# Altium PCB pcb.PCBDOC (part 3 of 4)
Units mil, origin at the board's own origin, x right, y up, seen from the top; angles counter-clockwise.
Board outline 6250 x 3000 mil, 6 copper layers (Top Layer, Internal Plane 1, Mid-Layer 1, Mid-Layer 2, Internal Plane 2, Bottom Layer); 189 components, 357 nets, 1696 pads, 997 vias.
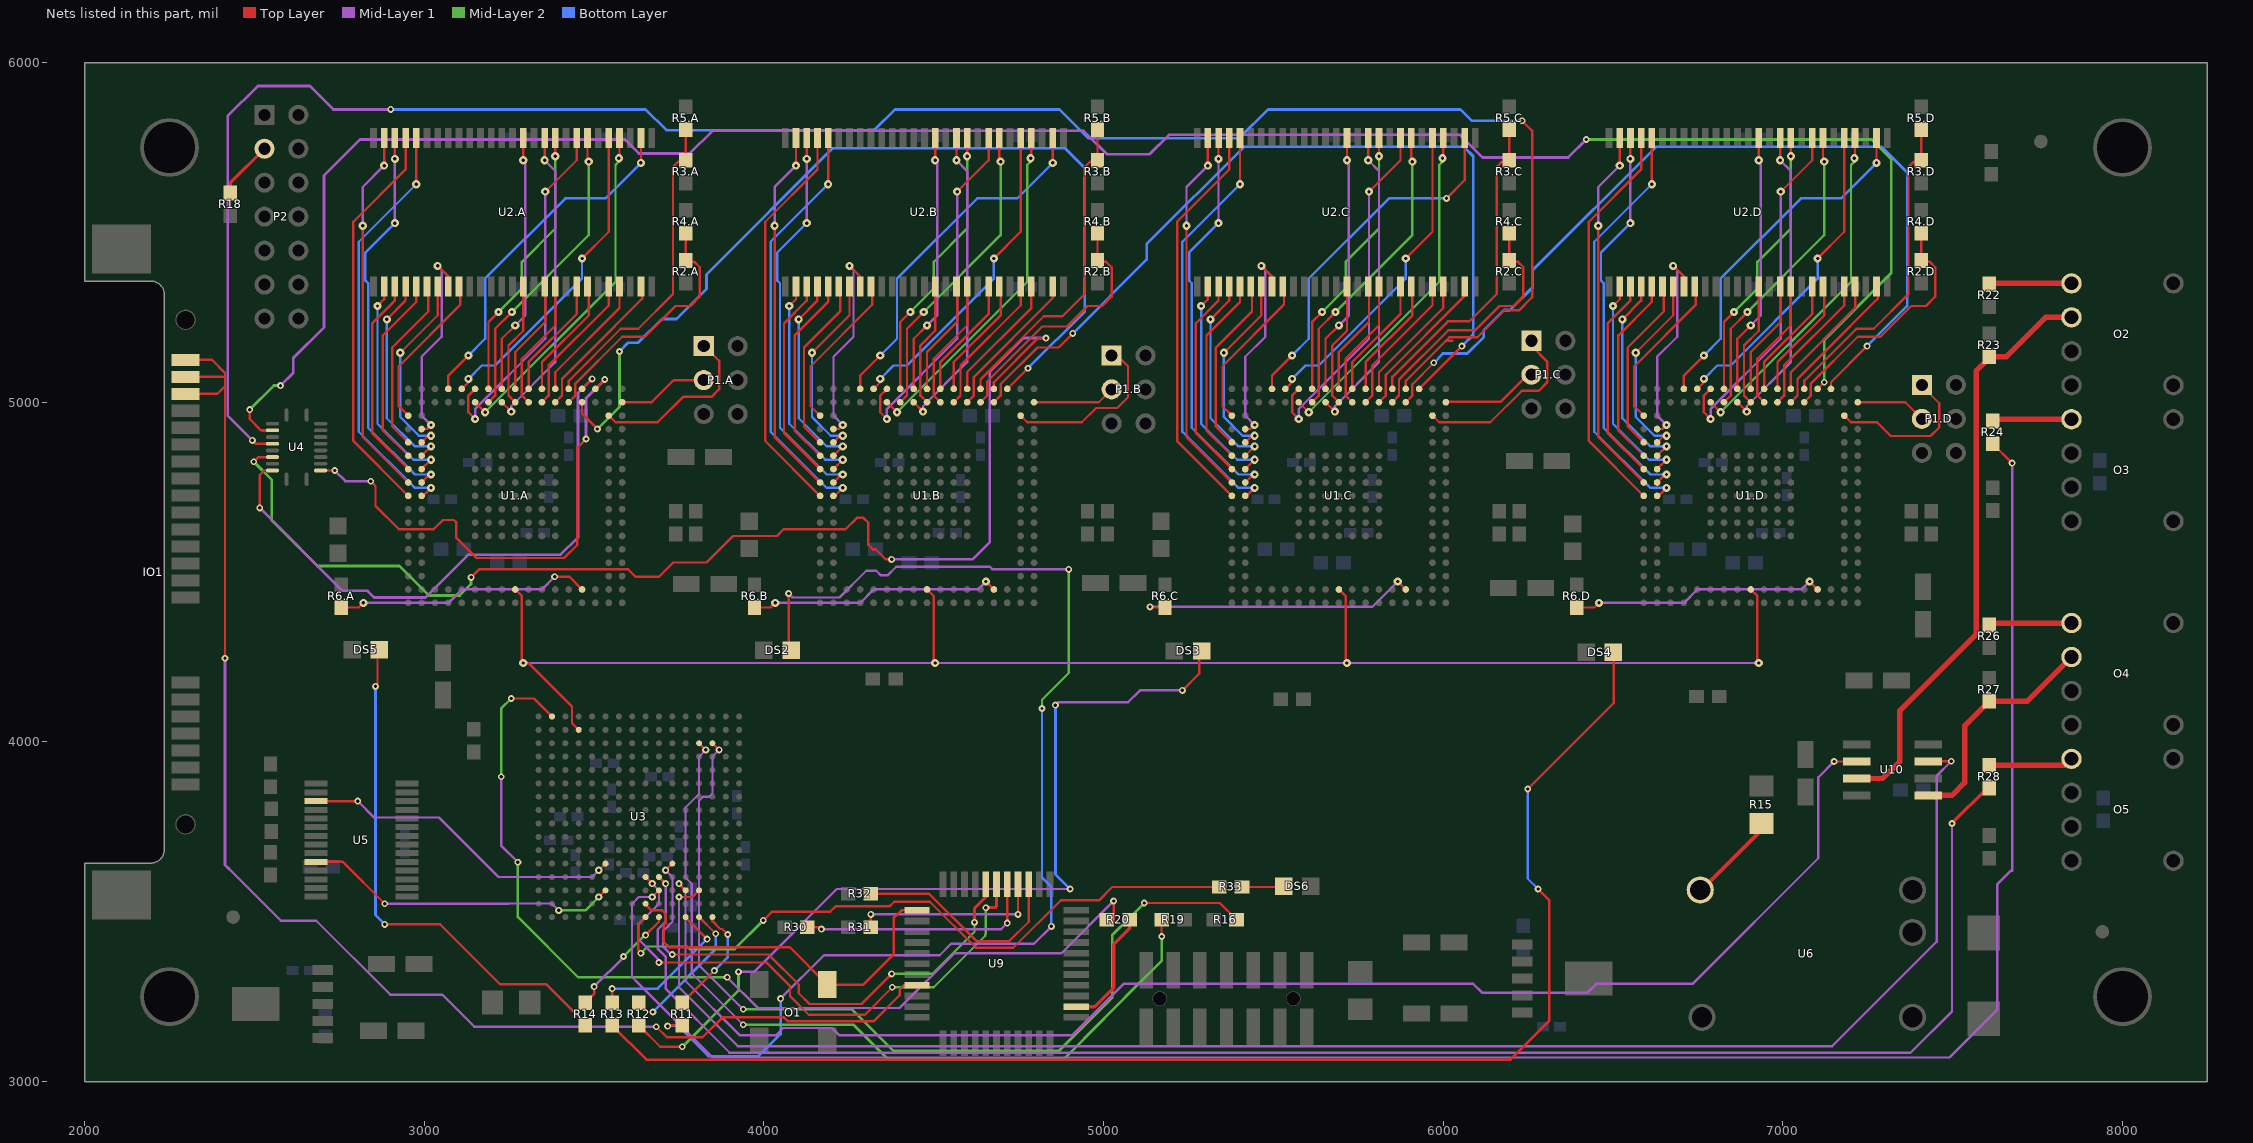
[diagram p7: the nets of this part, all layers, seen from the top]

## Via types
v1: diameter 24, hole 10, Top Layer to Bottom Layer, tented top, 281 vias
v2: diameter 24, hole 10, Top Layer to Bottom Layer, 250 vias
v3: diameter 20, hole 10, Top Layer to Bottom Layer, 211 vias
v4: diameter 21.2, hole 10, Top Layer to Bottom Layer, tented top, 109 vias
v5: diameter 20, hole 10, Top Layer to Bottom Layer, tented top, 96 vias
v6: diameter 40, hole 20, Top Layer to Bottom Layer, 25 vias
v7: diameter 25, hole 15, Top Layer to Bottom Layer, 9 vias
v8: diameter 35, hole 20, Top Layer to Bottom Layer, 8 vias
v9: diameter 40, hole 25, Top Layer to Bottom Layer, 8 vias

## Nets (pads, with @x,y where several pads share a name; then routed paths per layer and width w, separated by ;. In a path a pad name is that pad's centre, name@x,y a point inside that pad or via, vN(x,y) a via of type N, cw(c..) or ccw(c..) an arc to the next point about the centre after c; other vN are vias at no path point) (continued)
NetDS2_1: DS2.1 R11.2 | length 3579.5
  Top Layer w7: v3@3718.5,3165.35 R11.2@3759.84,3165.35 ; DS2.1@4072.83,4261.81 v3(4072.83,4437.01)
  Mid-Layer 1 w7: v3(4049.21,3244.09) 4177.17,3372.05 4517.72,3372.05 4551.18,3405.51 4795.28,3405.51 v3(4846.46,3456.69) ; v3(4072.83,4437.01) 4084.65,4425.2 4222.44,4425.2 4301.18,4503.94 4330.71,4503.94 4344.49,4490.16 4364.17,4490.16 4389.76,4515.75 4665.35,4515.75 4673.23,4507.87 v3(4897.64,4507.87)
  Mid-Layer 2 w7: v3(4818.9,4098.43) 4818.9,4124.02 4897.64,4202.76 v3(4897.64,4507.87)
  Bottom Layer w7: v3(3716.54,3163.39) 3748.03,3163.39 3836.61,3074.8 3984.25,3074.8 4049.21,3139.76 v3(4049.21,3244.09) ; v3(4818.9,4098.43) 4818.9,3600.39 4846.46,3572.83 v3(4846.46,3456.69)
NetDS3_1: DS3.1 R12.2 | length 2604.3
  Top Layer w7: R12.2@3631.89,3165.35 3694.88,3102.36 v3(3759.84,3102.36) ; v3(5232.28,4151.57) 5281.5,4200.79 DS3.1@5281.5,4263.78
  Mid-Layer 1 w7: v3(3925.2,3322.83) 3970.47,3322.83 4214.57,3566.93 v3(4901.57,3566.93) ; v3(4858.27,4108.27) 4867.13,4117.13 5072.83,4117.13 5107.28,4151.57 v3(5232.28,4151.57)
  Mid-Layer 2 w8: v3(3759.84,3102.36) 3925.2,3267.72 v3(3925.2,3322.83)
  Bottom Layer w8: v3(4858.27,4108.27) 4858.27,3610.24 v3(4901.57,3566.93)
NetDS4_1: DS4.1 R13.2 | length 4062.2
  Top Layer w7: R13.2@3553.15,3165.35 3654,3064.5 6198.36,3064.5 6312.01,3178.15 6312.01,3534.45 v3(6279.53,3566.93) ; v3(6249.02,3861.22) 6501.97,4114.17 DS4.1@6501.97,4261.81
  Bottom Layer w6: v3(6249.02,3861.22) 6249.02,3597.44 v3(6279.53,3566.93)
NetDS5_1: DS5.1 R14.2 | length 1518.4
  Top Layer w7: v3(2856.3,4163.39) 2862.2,4169.29 DS5.1@2862.2,4255.91 ; v3(2883.86,3462.6) 3047.24,3462.6 3223.63,3286.21 3359.46,3286.21 R14.2@3474.41,3171.26
  Bottom Layer w8: v3(2856.3,4163.39) 2856.3,3490.16 v3(2883.86,3462.6)
NetDS6_1: DS6.1 R33.2 | length 135.8
  Top Layer w7: R33.2@5407.48,3572.83 DS6.1@5543.31,3572.83
NetIO1_P13: IO1.P13 IO1.P14 IO1.P15 U9.8 | length 4147.6
  Top Layer w7: IO1.P13@2297.24,5025 2391.14,5025 2413.39,5047.24 ; IO1.P14@2297.24,5075 2407.28,5075 ; IO1.P15@2297.24,5125 2375,5125 2413.39,5086.61 v3(2413.39,4246.06) ; v3(3683.07,3161.42) 3714.28,3130.21 3819.18,3130.21 3877.95,3188.98 4059.06,3188.98 4070.87,3177.17 4322.83,3177.17 4399.61,3253.94 4399.61,3271.65 4411.42,3283.46 U9.8@4450.79,3283.46
  Mid-Layer 1 w7: 2426.18,3625 2577.76,3473.43 2682.09,3473.43 2899.61,3255.91 3053.15,3255.91 3147.64,3161.42 v3(3683.07,3161.42)
  Mid-Layer 1 w8: v3(2413.39,4246.06) 2413.39,3637.8 2426.18,3625
NetO1_3: O1.3 U3.R9 U9.1 | length 1108.5
  Top Layer w7: U3.R9@3650.59,3522.64 U3.R9@3651.58,3523.62 ; U3.R9@3651.57,3521.65 3669.29,3503.94 3700.79,3503.94 3710.63,3494.09 3710.63,3466.54 3704.72,3460.63 3704.72,3411.42 3720.47,3395.67 4075.98,3395.67 O1.3@4186.22,3285.43 4293.31,3285.43 4381.89,3374.02 4381.89,3481.1 4404.72,3503.94 U9.1@4450.79,3503.94
NetO2_1: O2.1 R22.1 | length 242.4
  Top Layer w16: R22.1@7608.27,5348.43 7609.84,5350 O2.1@7850,5350
NetO2_2: O2.2 R23.1 U10.3 | length 1739.2
  Top Layer w16: U10.3@7217.52,3892.32 7293.9,3892.32 7344.49,3942.91 7344.49,4092.52 7517.3,4265.33 7568.9,4316.93 7568.9,5091.54 R23.1@7611.22,5133.86 ; R23.1@7608.27,5133.86 7657.48,5133.86 7773.62,5250 O2.2@7850,5250
NetO3_1: O3.1 R24.2 | length 230.7
  Top Layer w16: R24.2@7619.29,4950 O3.1@7850,4950
NetO4_1: O4.1 R26.1 | length 242.7
  Top Layer w16: R26.1@7608.27,4349.61 7607.87,4350 O4.1@7850,4350
NetO4_2: O4.2 R27.1 U10.5 | length 688.7
  Top Layer w16: U10.5@7428.15,3842.32 7497.83,3842.32 7535.43,3879.92 7535.43,4047.24 R27.1@7608.27,4120.08 7720.08,4120.08 O4.2@7850,4250
NetO5_1: O5.1 R28.2 | length 249.6
  Top Layer w16: R28.2@7608.27,3931.1 7831.1,3931.1 O5.1@7850,3950
NetP1.A_1: P1.A.1 U1.A.R2 | length 512.7
  Top Layer w7: U1.A.R2@3543.31,4960.63 3562.99,4940.94 3687.01,4940.94 3761.81,5015.75 3845.47,5015.75 3868.11,5038.39 3868.11,5122.05 P1.A.1@3828.74,5161.42
NetP1.A_3: P1.A.3 U1.A.T1 | length 267.2
  Top Layer w7: U1.A.T1@3582.68,5000 3669.29,5000 3734.65,5065.35 P1.A.3@3822.83,5065.35
NetP1.B_1: P1.B.1 U1.B.R2 | length 507.5
  Top Layer w7: U1.B.R2@4755.9,4960.63 4775.59,4940.94 4936.02,4940.94 4978.35,4983.27 5040.35,4983.27 5071.85,5014.76 5071.85,5106.3 5040.35,5137.8 P1.B.1@5023.62,5137.8
NetP1.B_3: P1.B.3 U1.B.T1 | length 244
  Top Layer w7: U1.B.T1@4795.28,5000 4985.83,5000 P1.B.3@5023.62,5037.8
NetP1.C_1: P1.C.1 U1.C.R2 | length 536.5
  Top Layer w7: U1.C.R2@5968.5,4960.63 5988.19,4940.94 6138.78,4940.94 6231.3,5033.46 6281.5,5033.46 6306.1,5058.07 6306.1,5120.08 6259.84,5166.34 P1.C.1@6259.84,5181.1
NetP1.C_3: P1.C.3 U1.C.T1 | length 282.3
  Top Layer w7: U1.C.T1@6002.95,5000.98 6168.31,5000.98 P1.C.3@6250.98,5083.66
NetP1.D_1: P1.D.1 U1.D.R2 | length 461.2
  Top Layer w7: U1.D.R2@7181.1,4960.63 7200.79,4940.94 7277.56,4940.94 7317.91,4900.59 7435.04,4900.59 7460.63,4926.18 7460.63,4997.05 7409.45,5048.23 P1.D.1@7409.45,5051.18
NetP1.D_3: P1.D.3 U1.D.T1 | length 209.2
  Top Layer w7: U1.D.T1@7220.47,5000 7360.63,5000 P1.D.3@7409.45,4951.18
NetP2_3: P2.3 R18.1 | length 171.9
  Top Layer w9: R18.1@2429.13,5616.14 2429.13,5646.06 P2.3@2529.53,5746.46
NetR2.A_2: R2.A.2 R4.A.1 U1.A.T5 | length 757.3
  Top Layer w7: U1.A.T5@3425.2,5000 3444.88,5019.69 3444.88,5055.12 3582.68,5192.91 3649.61,5192.91 3740.16,5283.46 3783.46,5283.46 3811.02,5311.02 3811.02,5397.64 3795.28,5413.39 3767.72,5413.39 3769.68,5415.35 R4.A.1@3769.68,5498.03
NetR2.B_2: R2.B.2 R4.B.1 U1.B.T5 | length 760.8
  Top Layer w7: U1.B.T5@4637.79,5000 4657.48,5019.69 4657.48,5061.02 4819.53,5223.08 4892.37,5223.08 4952.76,5283.46 4996.06,5283.46 5023.62,5311.02 5023.62,5397.64 5007.87,5413.39 4980.31,5413.39 4982.28,5415.35 R4.B.1@4982.28,5498.03
NetR2.C_2: R2.C.2 R4.C.1 U1.C.T5 | length 764.2
  Top Layer w7: U1.C.T5@5850.39,5000 5870.08,5019.69 5870.08,5066.93 6014.91,5211.76 6093.65,5211.76 6165.35,5283.46 6208.66,5283.46 6236.22,5311.02 6236.22,5397.64 6220.47,5413.39 6192.91,5413.39 6194.88,5415.35 R4.C.1@6194.88,5498.03
NetR2.D_2: R2.D.2 R4.D.1 U1.D.T5 | length 757.3
  Top Layer w7: U1.D.T5@7062.99,5000 7082.68,5019.69 7082.68,5055.12 7220.47,5192.91 7287.4,5192.91 7377.95,5283.46 7421.26,5283.46 7448.82,5311.02 7448.82,5397.64 7433.07,5413.39 7405.51,5413.39 7407.48,5415.35 R4.D.1@7407.48,5498.03
NetR3.A_2: R3.A.2 R5.A.1 U1.A.U5 | length 946.8
  Top Layer w7: U1.A.U5@3425.2,5039.37 3425.2,5062.99 3578.74,5216.54 3629.92,5216.54 3732.28,5318.9 3732.28,5692.91 3748.03,5708.66 3765.75,5708.66 R3.A.2@3769.68,5712.6 R5.A.1@3769.68,5803.15
NetR3.B_2: R3.B.2 R5.B.1 U1.B.U5 | length 949.1
  Top Layer w7: U1.B.U5@4637.79,5039.37 4637.79,5066.93 4823.94,5253.07 4879.06,5253.07 4944.88,5318.9 4944.88,5692.91 4960.63,5708.66 4978.35,5708.66 R3.B.2@4982.28,5712.6 R5.B.1@4982.28,5803.15
NetR3.C_2: R3.C.2 R5.C.1 U1.C.U5 | length 953.8
  Top Layer w7: U1.C.U5@5850.39,5039.37 5850.39,5074.8 6013.78,5238.19 6076.77,5238.19 6157.48,5318.9 6157.48,5692.91 6173.23,5708.66 6190.94,5708.66 R3.C.2@6194.88,5712.6 R5.C.1@6194.88,5803.15
NetR3.D_2: R3.D.2 R5.D.1 U1.D.U5 | length 946.8
  Top Layer w7: U1.D.U5@7062.99,5039.37 7062.99,5062.99 7216.54,5216.54 7267.72,5216.54 7370.08,5318.9 7370.08,5692.91 7385.83,5708.66 7403.54,5708.66 R3.D.2@7407.48,5712.6 R5.D.1@7407.48,5803.15
NetR6.A_1: R6.A.1 U1.A.B4 | length 761.7
  Top Layer w7: R6.A.1@2755.91,4395.67 2807.09,4395.67 v2(2820.87,4409.45) ; v5(3383.86,4486.22) 3427.16,4486.22 U1.A.B4@3464.57,4448.82
  Mid-Layer 1 w7: v2(2820.87,4409.45) 3070.87,4409.45 3110.49,4449.07 3346.71,4449.07 v5(3383.86,4486.22)
NetR6.B_1: R6.B.1 U1.B.B4 | length 750.2
  Top Layer w7: R6.B.1@3968.5,4395.67 4019.69,4395.67 v2(4033.46,4409.45) ; v1(4653.54,4472.44) U1.B.B4@4677.16,4448.82
  Mid-Layer 1 w7: v2(4033.46,4409.45) 4283.46,4409.45 4323.09,4449.07 4630.17,4449.07 v1(4653.54,4472.44)
NetR6.C_1: R6.C.1 U1.C.B4 | length 838.8
  Top Layer w7: v3(5136.81,4397.64) 5138.78,4395.67 R6.C.1@5181.1,4395.67 ; v1(5866.14,4472.44) U1.C.B4@5889.76,4448.82
  Mid-Layer 1 w7: v3(5136.81,4397.64) 5791.34,4397.64 v1(5866.14,4472.44)
NetR6.D_1: R6.D.1 U1.D.B4 | length 750.2
  Top Layer w7: R6.D.1@6393.7,4395.67 6444.88,4395.67 v2(6458.66,4409.45) ; v1(7078.74,4472.44) U1.D.B4@7102.36,4448.82
  Mid-Layer 1 w7: v2(6458.66,4409.45) 6708.66,4409.45 6748.28,4449.07 7055.37,4449.07 v1(7078.74,4472.44)
NetR11_1: R11.1 U3.T14 | length 329.6
  Top Layer w7: R11.1@3759.84,3232.28 v3(3854.33,3326.77) ; U3.T14@3848.43,3484.25 3848.43,3472.44 3871.55,3449.32 3877.45,3449.32 v3(3893.7,3433.07)
  Bottom Layer w8: v3(3854.33,3326.77) 3893.7,3366.14 v3(3893.7,3433.07)
NetR12_1: R12.1 U3.T13 | length 429.3
  Top Layer w7: R12.1@3631.89,3232.28 3659.45,3204.72 v3(3673.23,3204.72) ; U3.T13@3809.06,3484.25 v3(3858.27,3435.04)
  Bottom Layer w8: v3(3673.23,3204.72) 3858.27,3389.76 v3(3858.27,3435.04)
NetR13_1: R13.1 U3.T12 | length 473.1
  Top Layer w7: R13.1@3553.15,3232.28 v3(3553.15,3273.62) ; U3.T12@3767.72,3484.25 v3(3832.68,3419.29)
  Bottom Layer w8: v3(3553.15,3273.62) 3687.01,3273.62 v3(3832.68,3419.29)
NetR14_1: R14.1 U3.T10 | length 340.3
  Top Layer w7: R14.1@3474.41,3232.28 3500,3257.87 v3(3500,3279.53) ; v3(3651.57,3431.1) 3690.95,3470.47 U3.T10@3690.95,3484.25
  Mid-Layer 1 w7: v3(3500,3279.53) v3@3587.6,3367.13
  Mid-Layer 2 w7: v3(3586.61,3368.11) v3@3649.61,3431.1
NetR15_1: R15.1 U6.4 | length 286.6
  Top Layer w12: U6.4@6751.97,3555.12 6944.88,3748.03 R15.1@6944.88,3761.81
NetR16_2: R16.2 U3.C14 | length 2691.4
  Top Layer w6: v3(5120.08,3525.59) 5342.52,3525.59 R16.2@5391.73,3476.38
  Top Layer w7: U3.C14@3848.43,3996.06 v4(3868.11,3976.38)
  Mid-Layer 1 w6: 3809.06,3342.52 3809.06,3826.77 3820.87,3838.58 3838.58,3838.58 3848.43,3848.43 3848.43,3956.69 v4(3868.11,3976.38)
  Mid-Layer 1 w7: 3809.06,3342.52 v3(3938.98,3212.6)
  Mid-Layer 2 w8: v3(3938.98,3212.6) 4259.84,3212.6 4381.89,3090.55 4868.11,3090.55 5025.59,3248.03 5025.59,3431.1 v3(5120.08,3525.59)
NetR19_1: R19.1 U3.C13 | length 2447.7
  Top Layer w6: v3(5171.26,3427.17) R19.1@5171.26,3476.38
  Top Layer w7: U3.C13@3809.06,3996.06 v4(3828.74,3976.38)
  Mid-Layer 1 w6: 3787.4,3582.68 3769.68,3600.39 3769.68,3808.07 3809.06,3847.44 3809.06,3956.69 v4(3828.74,3976.38)
  Mid-Layer 1 w7: 3787.4,3582.68 3787.4,3318.9 v3(3938.98,3167.32)
  Mid-Layer 2 w8: v3(3938.98,3167.32) 4263.78,3167.32 4366.1,3065 4881.93,3065 5124.23,3309.82 ; 5125,3309.06 5171.26,3355.31 v3(5171.26,3427.17)
NetR20_1: R20.1 U9.24 | length 353.4
  Top Layer w10: U9.24@4919.29,3220.47 4974.41,3220.47 5029.53,3275.59 5029.53,3404.53 5076.77,3451.77 R20.1@5076.77,3476.38
NetR20_2: R20.2 U3.A2 | length 2876.8
  Top Layer w7: v3(3255.91,4127.95) 3322.83,4127.95 U3.A2@3375.98,4074.8 ; R20.2@5029.53,3468.5 v3(5029.53,3531.5)
  Mid-Layer 1 w7: v3(3226.38,3897.64) 3226.38,3694.88 v3(3275.59,3645.67) ; v3(3891.73,3307.09) 3982.42,3216.4 4399.47,3216.4 4561.02,3377.95 4875.98,3377.95 v3(5029.53,3531.5)
  Mid-Layer 2 w7: v3(3226.38,3897.64) 3226.38,4098.43 v3(3255.91,4127.95) ; v3(3275.59,3645.67) 3275.59,3484.25 3452.76,3307.09 v3(3891.73,3307.09)
NetR24_1: R24.1 U3.P10 | length 6203
  Top Layer w7: v4(3671.26,3543.31) U3.P10@3690.95,3562.99 ; R24.1@7618.11,4877.95 v3(7675.2,4820.87)
  Top Layer w10: R24.1@7614.17,4875.98 R24.1@7620.08,4875.98
  Mid-Layer 1 w6: 3629.25,3290.04 3612.2,3307.09 3612.2,3523.62 3631.89,3543.31 v4(3671.26,3543.31)
  Mid-Layer 1 w7: 3629.25,3290.04 3848.43,3070.87 7491.14,3070.87 7630.91,3210.63 7630.91,3579.72 7672.24,3621.06 7675.2,3621.06 v3(7675.2,4820.87)
NetR28_1: R28.1 U3.N10 | length 4978.1
  Top Layer w7: U3.N10@3690.95,3602.36 v4(3710.63,3582.68)
  Top Layer w10: v3(7498.03,3759.84) R28.1@7604.33,3866.14
  Mid-Layer 1 w7: v4(3710.63,3582.68) 3710.63,3470.47 3687.01,3446.85 3687.01,3391.73 3710.63,3368.11 3710.63,3273.62 3899.61,3084.65 ; 3897.64,3084.65 7375.98,3084.65 7498.03,3206.69 v3(7498.03,3759.84)
NetR30_1: R30.1 U9.38 | length 712.5
  Top Layer w7: R30.1@4127.95,3454.72 4163.39,3454.72 v3(4169.29,3448.82) ; v3(4716.54,3466.54) U9.38@4716.54,3580.71
  Mid-Layer 1 w7: v3(4169.29,3448.82) 4698.82,3448.82 v3(4716.54,3466.54)
NetR31_1: R31.1 U9.37 | length 559.1
  Top Layer w7: R31.1@4314.96,3454.72 v3(4314.96,3492.13) ; v3(4748.03,3492.13) U9.37@4748.03,3580.71
  Mid-Layer 1 w7: v3(4314.96,3492.13) v3(4748.03,3492.13)
NetR32_1: R32.1 U9.36 | length 656.3
  Top Layer w7: R32.1@4314.96,3553.15 4486.22,3553.15 4625.98,3413.39 4722.44,3413.39 4779.53,3470.47 U9.36@4779.53,3580.71
NetR33_1: R33.1 U3.T9 | length 2021.1
  Top Layer w7: v3(3637.8,3377.95) 3629.92,3385.83 3629.92,3462.6 U3.T9@3651.58,3484.25 ; v3(3998.03,3474.41) 4023.62,3500 4194.88,3500 4210.63,3515.75 4370.08,3515.75 4383.86,3529.53 4488.19,3529.53 4624.02,3393.7 4734.25,3393.7 4874.02,3533.46 4986.22,3533.46 5025.59,3572.83 R33.1@5340.55,3572.83
  Mid-Layer 2 w7: v3(3637.8,3377.95) 3657.48,3397.64 3773.62,3397.64 3781.5,3389.76
  Mid-Layer 2 w8: 3781.5,3389.76 3913.39,3389.76 v3(3998.03,3474.41)
NetU1.A_J16: U1.A.J16 U2.A.23 | length 1253.7
  Top Layer w7: v2(2976.54,5641.89) U2.A.23@2976.54,5778.5 ; U1.A.J16@2992.13,4724.41 2996.06,4724.41 v1(3019.68,4748.03)
  Bottom Layer w7: v2(2976.54,5641.89) 2807.09,5472.44 2807.09,4913.39 2972.44,4748.03 v1(3019.68,4748.03)
NetU1.A_J17: U1.A.J17 U2.A.24 | length 1184.6
  Top Layer w7: U2.A.24@2945.04,5778.5 2945.04,5685.2 2791.34,5531.5 2791.34,4885.83 U1.A.J17@2952.76,4724.41
NetU1.A_K16: U1.A.K16 U2.A.25 | length 1172.9
  Top Layer w7: v2(2913.39,5716.54) U2.A.25@2913.39,5779.53 ; U1.A.K16@2992.13,4763.78 3015.75,4787.4 v1(3019.68,4787.4)
  Mid-Layer 1 w7: v2(2913.39,5527.56) v2(2913.39,5716.54)
  Bottom Layer w7: v2(2913.39,5527.56) 2826.77,5440.94 2826.77,5358.27 2834.65,5350.39 2834.65,4925.2 2972.44,4787.4 v1(3019.68,4787.4)
NetU1.A_K17: U1.A.K17 U2.A.26 | length 1101.2
  Top Layer w7: v2(2818.9,5519.69) 2818.9,4897.64 U1.A.K17@2952.76,4763.78 ; v2(2881.89,5696.85) U2.A.26@2881.89,5783.46
  Mid-Layer 1 w7: v2(2818.9,5519.69) 2818.9,5633.86 v2(2881.89,5696.85)
NetU1.A_L16: U1.A.L16 U2.A.29 | length 653
  Top Layer w7: v2(2862.2,5283.46) 2881.89,5303.15 U2.A.29@2881.89,5341.34 ; U1.A.L16@2992.13,4803.15 v1(3019.68,4830.71)
  Bottom Layer w7: v2(2862.2,5283.46) 2862.2,4937.01 2968.5,4830.71 v1(3019.68,4830.71)
NetU1.A_L17: U1.A.L17 U2.A.30 | length 615.1
  Top Layer w7: U2.A.30@2913.39,5346.46 2913.39,5299.21 2846.46,5232.28 2846.46,4909.45 U1.A.L17@2952.76,4803.15
NetU1.A_M16: U1.A.M16 U2.A.31 | length 614.6
  Top Layer w7: v2(2889.76,5244.09) 2944.88,5299.21 U2.A.31@2944.88,5341.34 ; U1.A.M16@2992.13,4842.52 v1(3019.68,4870.08)
  Bottom Layer w7: v2(2889.76,5244.09) 2889.76,4952.76 2972.44,4870.08 v1(3019.68,4870.08)
NetU1.A_M17: U1.A.M17 U2.A.32 | length 570.8
  Top Layer w7: U1.A.M17@2952.76,4842.52 2877.95,4917.32 2877.95,5196.85 2976.54,5295.43 U2.A.32@2976.54,5341.5
NetU1.A_N16: U1.A.N16 U2.A.34 | length 579.6
  Top Layer w7: v2(2929.13,5145.67) 3039.53,5256.06 U2.A.34@3039.53,5341.5 ; U1.A.N16@2992.13,4881.89 3011.81,4901.57 v1(3019.68,4901.57)
  Bottom Layer w7: v2(2929.13,5145.67) 2929.13,4956.69 2984.25,4901.57 v1(3019.68,4901.57)
NetU1.A_N17: U1.A.N17 U2.A.33 | length 528.2
  Top Layer w7: U1.A.N17@2952.76,4881.89 2905.51,4929.13 2905.51,5161.42 3011.81,5267.72 U2.A.33@3011.81,5346.46
NetU1.A_P16: U1.A.P16 U2.A.35 | length 618.9
  Top Layer w7: U1.A.P16@2992.13,4921.26 3007.87,4921.26 v1(3019.68,4933.07) ; v2(3039.37,5401.57) 3071.02,5369.92 U2.A.35@3071.02,5341.5
  Mid-Layer 1 w7: v1@3019.68,4937.01 v1(3019.68,4933.07) 2992.13,4960.63 2992.13,5133.86 3051.18,5192.91 3051.18,5389.76 v2(3039.37,5401.57)
NetU1.A_R17: U1.A.R17 U2.A.36 | length 464.4
  Top Layer w7: U1.A.R17@2952.76,4960.63 2925.2,4988.19 2925.2,5106.3 3106.3,5287.4 U2.A.36@3106.3,5338.58
NetU1.A_T4: U1.A.T4 U1.B.U3 | length 2764.1
  Top Layer w7: U1.A.T4@3464.57,5000 3464.57,4966.54 v5(3509.84,4921.26) ; U1.B.U3@4716.53,5039.37 v5(4777.56,5100.39)
  Mid-Layer 2 w8: v5(3509.84,4921.26) 3574.8,4986.22 v3(3574.8,5149.61)
  Bottom Layer w8: v3(3574.8,5149.61) 3600.39,5175.2 3629.92,5175.2 3699.8,5245.08 3742.13,5245.08 3830.71,5333.66 3830.71,5375.98 4202.76,5748.03 4885.83,5748.03 4944.88,5688.98 4944.88,5267.72 v5(4777.56,5100.39)
NetU1.A_T6: U1.A.T6 U2.A.53 | length 460.3
  Top Layer w7: U1.A.T6@3385.83,5000 3405.51,5019.69 3405.51,5068.9 3481.61,5145 3641.73,5305.12 U2.A.53@3641.73,5354.33
NetU1.A_T7: U1.A.T7 U2.A.50 | length 423.1
  Top Layer w7: U1.A.T7@3346.46,5000 3366.14,5019.69 3366.14,5108.27 3543.46,5285.59 U2.A.50@3543.46,5341.5
NetU1.A_T8: U1.A.T8 U2.A.45 | length 390.5
  Top Layer w7: U1.A.T8@3307.09,5000 3287.4,5019.69 3287.4,5127.95 3385.98,5226.54 U2.A.45@3385.98,5341.5
NetU1.A_T9: U1.A.T9 U2.A.42 | length 367.7
  Top Layer w7: U1.A.T9@3267.72,5000 3248.03,5019.68 3248.03,5167.32 3291.5,5210.79 U2.A.42@3291.5,5341.5
NetU1.A_T10: U1.A.T10 U2.A.11 | length 897.2
  Top Layer w7: U1.A.T10@3228.35,5000 v1(3255.91,4972.44) ; v2(3354.33,5712.6) U2.A.11@3354.33,5763.78
  Mid-Layer 1 w7: v1(3255.91,4972.44) 3255.91,4988.19 3385.83,5118.11 3385.83,5681.1 v2(3354.33,5712.6)
NetU1.A_T11: U1.A.T11 U2.A.7 | length 915.1
  Top Layer w7: U1.A.T11@3188.98,5000 3208.66,5019.69 3208.66,5216.54 v2(3257.87,5265.75) ; U2.A.7@3480.47,5791.18 3480.47,5712.44 v2(3484.25,5708.66)
  Mid-Layer 2 w7: v2(3257.87,5265.75) 3484.25,5492.13 v2(3484.25,5708.66)
NetU1.A_T12: U1.A.T12 U2.A.4 | length 1036.4
  Top Layer w7: U1.A.T12@3149.61,5000 v1(3179.13,4970.47) ; v2(3572.83,5718.5) 3574.8,5720.47 U2.A.4@3574.8,5791.34
  Mid-Layer 1 w7: v1(3179.13,4970.47) v1@3188.98,4970.47
  Mid-Layer 2 w7: v1(3179.13,4970.47) 3562.99,5354.33 3562.99,5698.82 3572.83,5708.66 v2(3572.83,5718.5)
NetU1.A_U3: U1.A.U3 U4.12 | length 1521.6
  Top Layer w7: U4.12@2694.88,4799.21 v3(2736.22,4799.21) ; v3(2842.52,4767.72) 2856.3,4753.94 2856.3,4694.88 2925.2,4625.98 3027.56,4625.98 3055.12,4653.54 3086.61,4653.54 3094.49,4645.67 3094.49,4600.39 3153.54,4541.34 3411.42,4541.34 3450.79,4580.71 3450.79,4866.14 v5(3476.38,4891.73) ; U1.A.U3@3503.94,5039.37 v5(3531.5,5066.93)
  Mid-Layer 1 w8: v3(2736.22,4799.21) 2767.72,4767.72 v3(2842.52,4767.72) ; v5(3476.38,4891.73) 3476.38,5011.81 v5(3531.5,5066.93)
NetU1.A_U4: U1.A.U4 U4.9 | length 1784.6
  Top Layer w7: v3(2515.75,4688.98) 2515.75,4785.43 2529.53,4799.21 U4.9@2553.15,4799.21 ; U1.A.U4@3464.57,5039.37 v5(3494.09,5068.9)
  Mid-Layer 1 w8: v3(2515.75,4688.98) 2759.84,4444.88 2832.68,4444.88 2852.36,4425.2 3003.94,4425.2 3129.92,4551.18 3401.57,4551.18 3452.76,4602.36 3452.76,5027.56 v5(3494.09,5068.9)
NetU1.A_U6: U1.A.U6 U2.A.51 | length 380.5
  Top Layer w7: U1.A.U6@3385.83,5039.37 3385.83,5088.58 3574.96,5277.72 U2.A.51@3574.96,5341.5
NetU1.A_U7: U1.A.U7 U2.A.48 | length 362.2
  Top Layer w7: U1.A.U7@3346.46,5039.37 3346.46,5118.11 3484.25,5255.91 U2.A.48@3484.25,5344.49
NetU1.A_U8: U1.A.U8 U2.A.47 | length 360.9
  Top Layer w7: U1.A.U8@3307.09,5039.37 3307.09,5118.11 3448.98,5260 U2.A.47@3448.98,5341.5
NetU1.A_U9: U1.A.U9 U2.A.44 | length 341.8
  Top Layer w7: U1.A.U9@3267.72,5039.37 3267.72,5147.64 3356.3,5236.22 U2.A.44@3356.3,5344.49
NetU1.A_U10: U1.A.U10 U2.A.13 | length 770.1
  Top Layer w7: U1.A.U10@3228.35,5039.37 3228.35,5187.01 v2(3267.72,5226.38) ; v2(3291.5,5712.44) U2.A.13@3291.5,5778.5
  Mid-Layer 1 w7: v2(3267.72,5226.38) 3297.24,5255.91 3297.24,5706.69 v2(3291.5,5712.44)
NetU1.A_U11: U1.A.U11 U2.A.10 | length 820.5
  Top Layer w7: U1.A.U11@3188.98,5039.37 3188.98,5236.22 v2(3218.5,5265.75) ; v2(3385.83,5724.41) U2.A.10@3385.83,5778.35
  Mid-Layer 2 w7: v2(3218.5,5265.75) 3287.4,5334.65 3287.4,5413.39 3385.83,5511.81 v2(3385.83,5724.41)
NetU1.A_U12: U1.A.U12 U2.A.8 | length 1056.6
  Top Layer w7: v1(3149.61,4950.79) 3129.92,4970.47 3129.92,5019.69 U1.A.U12@3149.61,5039.37 ; v2(3356.3,5620.08) 3448.98,5712.76 U2.A.8@3448.98,5778.5
  Mid-Layer 1 w7: v1(3149.61,4950.79) 3149.61,4980.31 3356.3,5187.01 v2(3356.3,5620.08)
NetU1.A_U13: U1.A.U13 U2.A.5 | length 940.6
  Top Layer w7: U1.A.U13@3110.24,5039.37 3129.92,5059.06 v1(3129.92,5068.9) ; v2(3464.57,5423.23) 3543.31,5501.97 U2.A.5@3543.31,5777.56
  Bottom Layer w7: v1(3129.92,5068.9) 3169.29,5108.27 3208.66,5108.27 3464.57,5364.17 v2(3464.57,5423.23)
NetU1.A_U14: U1.A.U14 U2.A.2 | length 1043.2
  Top Layer w7: U1.A.U14@3070.87,5039.37 3070.87,5078.74 v2(3129.92,5137.8) ; v2(3637.95,5704.88) U2.A.2@3637.95,5778.5
  Bottom Layer w7: v2(3129.92,5137.8) 3179.13,5187.01 3179.13,5364.17 3415.35,5600.39 3533.46,5600.39 v2(3637.95,5704.88)
NetU1.B_J16: U1.B.J16 U2.B.23 | length 1253.7
  Top Layer w7: v2(4189.13,5641.89) U2.B.23@4189.13,5778.5 ; U1.B.J16@4204.72,4724.41 4208.66,4724.41 v1(4232.28,4748.03)
  Bottom Layer w7: v2(4189.13,5641.89) 4019.69,5472.44 4019.69,4913.39 4185.04,4748.03 v1(4232.28,4748.03)
NetU1.B_J17: U1.B.J17 U2.B.24 | length 1184.6
  Top Layer w7: U2.B.24@4157.64,5778.5 4157.64,5685.2 4003.94,5531.5 4003.94,4885.83 U1.B.J17@4165.35,4724.41
NetU1.B_K16: U1.B.K16 U2.B.25 | length 1172.9
  Top Layer w7: v2(4125.98,5716.54) U2.B.25@4125.98,5779.53 ; U1.B.K16@4204.72,4763.78 4228.35,4787.4 v1(4232.28,4787.4)
  Mid-Layer 1 w7: v2(4125.98,5527.56) v2(4125.98,5716.54)
  Bottom Layer w7: v2(4125.98,5527.56) 4039.37,5440.94 4039.37,5358.27 4047.24,5350.39 4047.24,4925.2 4185.04,4787.4 v1(4232.28,4787.4)
NetU1.B_K17: U1.B.K17 U2.B.26 | length 1101.2
  Top Layer w7: v2(4031.5,5519.69) 4031.5,4897.64 U1.B.K17@4165.35,4763.78 ; v2(4094.49,5696.85) U2.B.26@4094.49,5783.46
  Mid-Layer 1 w7: v2(4031.5,5519.69) 4031.5,5633.86 v2(4094.49,5696.85)
NetU1.B_L16: U1.B.L16 U2.B.29 | length 653
  Top Layer w7: v2(4074.8,5283.46) 4094.49,5303.15 U2.B.29@4094.49,5341.34 ; U1.B.L16@4204.72,4803.15 v1(4232.28,4830.71)
  Bottom Layer w7: v2(4074.8,5283.46) 4074.8,4937.01 4181.1,4830.71 v1(4232.28,4830.71)
NetU1.B_L17: U1.B.L17 U2.B.30 | length 615.1
  Top Layer w7: U2.B.30@4125.98,5346.46 4125.98,5299.21 4059.06,5232.28 4059.06,4909.45 U1.B.L17@4165.35,4803.15
NetU1.B_M16: U1.B.M16 U2.B.31 | length 614.6
  Top Layer w7: v2(4102.36,5244.09) 4157.48,5299.21 U2.B.31@4157.48,5341.34 ; U1.B.M16@4204.72,4842.52 v1(4232.28,4870.08)
  Bottom Layer w7: v2(4102.36,5244.09) 4102.36,4952.76 4185.04,4870.08 v1(4232.28,4870.08)
NetU1.B_M17: U1.B.M17 U2.B.32 | length 570.8
  Top Layer w7: U1.B.M17@4165.35,4842.52 4090.55,4917.32 4090.55,5196.85 4189.13,5295.43 U2.B.32@4189.13,5341.5
NetU1.B_N16: U1.B.N16 U2.B.34 | length 579.6
  Top Layer w7: v2(4141.73,5145.67) 4252.13,5256.06 U2.B.34@4252.13,5341.5 ; U1.B.N16@4204.72,4881.89 4224.41,4901.57 v1(4232.28,4901.57)
  Bottom Layer w7: v2(4141.73,5145.67) 4141.73,4956.69 4196.85,4901.57 v1(4232.28,4901.57)
NetU1.B_N17: U1.B.N17 U2.B.33 | length 528.2
  Top Layer w7: U1.B.N17@4165.35,4881.89 4118.11,4929.13 4118.11,5161.42 4224.41,5267.72 U2.B.33@4224.41,5346.46
NetU1.B_P16: U1.B.P16 U2.B.35 | length 618.9
  Top Layer w7: U1.B.P16@4204.72,4921.26 4220.47,4921.26 v1(4232.28,4933.07) ; v2(4251.97,5401.57) 4283.62,5369.92 U2.B.35@4283.62,5341.5
  Mid-Layer 1 w7: v1@4232.28,4937.01 v1(4232.28,4933.07) 4204.72,4960.63 4204.72,5133.86 4263.78,5192.91 4263.78,5389.76 v2(4251.97,5401.57)
NetU1.B_R17: U1.B.R17 U2.B.36 | length 464.4
  Top Layer w7: U1.B.R17@4165.35,4960.63 4137.8,4988.19 4137.8,5106.3 4318.9,5287.4 U2.B.36@4318.9,5338.58
NetU1.B_T4: U1.B.T4 U1.C.U3 | length 2531.5
  Top Layer w7: U1.B.T4@4677.16,5000 4696.85,5019.68 4696.85,5053.15 4805.12,5161.42 4868.11,5161.42 v3(4909.45,5202.76) ; U1.C.U3@5929.13,5039.37 v3(6055.12,5165.35)
  Bottom Layer w8: v3(4909.45,5202.76) 5126.98,5420.29 5126.98,5465.56 5413.39,5751.97 6061.02,5751.97 6088.58,5724.41 6088.58,5198.82 v3(6055.12,5165.35)
NetU1.B_T6: U1.B.T6 U2.B.53 | length 458.8
  Top Layer w7: U1.B.T6@4598.42,5000 4618.11,5019.69 4618.11,5074.8 4850.55,5307.24 U2.B.53@4850.55,5341.5 ; U2.B.53@4854.33,5341.5 U2.B.53@4854.33,5354.33
NetU1.B_T7: U1.B.T7 U2.B.50 | length 423.1
  Top Layer w7: U1.B.T7@4559.05,5000 4578.74,5019.69 4578.74,5108.27 4756.06,5285.59 U2.B.50@4756.06,5341.5
NetU1.B_T8: U1.B.T8 U2.B.45 | length 390.5
  Top Layer w7: U1.B.T8@4519.68,5000 4500,5019.69 4500,5127.95 4598.58,5226.54 U2.B.45@4598.58,5341.5
NetU1.B_T9: U1.B.T9 U2.B.42 | length 367.7
  Top Layer w7: U1.B.T9@4480.31,5000 4460.63,5019.68 4460.63,5167.32 4504.09,5210.79 U2.B.42@4504.09,5341.5
NetU1.B_T10: U1.B.T10 U2.B.11 | length 897.2
  Top Layer w7: U1.B.T10@4440.94,5000 v1(4468.5,4972.44) ; v2(4566.93,5712.6) U2.B.11@4566.93,5763.78
  Mid-Layer 1 w7: v1(4468.5,4972.44) 4468.5,4988.19 4598.43,5118.11 4598.43,5681.1 v2(4566.93,5712.6)
NetU1.B_T11: U1.B.T11 U2.B.7 | length 915.1
  Top Layer w7: U1.B.T11@4401.57,5000 4421.26,5019.69 4421.26,5216.54 v2(4470.47,5265.75) ; U2.B.7@4693.07,5791.18 4693.07,5712.44 v2(4696.85,5708.66)
  Mid-Layer 2 w7: v2(4470.47,5265.75) 4696.85,5492.13 v2(4696.85,5708.66)
NetU1.B_T12: U1.B.T12 U2.B.4 | length 1036.4
  Top Layer w7: U1.B.T12@4362.2,5000 v1(4391.73,4970.47) ; v2(4785.43,5718.5) 4787.4,5720.47 U2.B.4@4787.4,5791.34
  Mid-Layer 1 w7: v1(4391.73,4970.47) v1@4401.57,4970.47
  Mid-Layer 2 w7: v1(4391.73,4970.47) 4775.59,5354.33 4775.59,5698.82 4785.43,5708.66 v2(4785.43,5718.5)
NetU1.B_U4: U1.B.U4 U4.7 | length 3654.2
  Top Layer w7: v3(2498.03,4824.8) 2511.81,4838.58 U4.7@2557.09,4838.58 ; v5(3137.8,4484.25) 3161.42,4507.87 3600.39,4507.87 3622.05,4486.22 3690.94,4486.22 3732.85,4528.13 3831.28,4528.13 3909.45,4606.3 4038.39,4606.3 4058.07,4625.98 4240.16,4625.98 4273.62,4659.45 4293.31,4659.45 4307.09,4645.67 4307.09,4580.71 4320.87,4566.93 4329.11,4566.93 4358.64,4537.4 v5(4375.98,4537.4) ; U1.B.U4@4677.16,5039.37 4677.16,5059.05 4807.09,5188.98 v3(4830.71,5188.98)
  Mid-Layer 1 w8: v5(4375.98,4537.4) 4614.17,4537.4 4665.35,4588.58 4665.35,5090.55 4763.78,5188.98 v3(4830.71,5188.98)
  Mid-Layer 2 w8: v3(2498.03,4824.8) 2551.18,4771.65 2551.18,4718.5 ; 2551.18,4738.19 2551.18,4651.57 2621.79,4580.96 2685.04,4517.72 2927.17,4517.72 3013.78,4431.1 3104.33,4431.1 3137.8,4464.57 v5(3137.8,4484.25)
NetU1.B_U6: U1.B.U6 U2.B.51 | length 380.5
  Top Layer w7: U1.B.U6@4598.42,5039.37 4598.43,5088.58 4787.56,5277.72 U2.B.51@4787.56,5341.5
NetU1.B_U7: U1.B.U7 U2.B.48 | length 362.2
  Top Layer w7: U1.B.U7@4559.05,5039.37 4559.06,5118.11 4696.85,5255.91 U2.B.48@4696.85,5344.49
NetU1.B_U8: U1.B.U8 U2.B.47 | length 360.9
  Top Layer w7: U1.B.U8@4519.68,5039.37 4519.69,5118.11 4661.57,5260 U2.B.47@4661.57,5341.5
NetU1.B_U9: U1.B.U9 U2.B.44 | length 341.8
  Top Layer w7: U1.B.U9@4480.31,5039.37 4480.31,5147.64 4568.9,5236.22 U2.B.44@4568.9,5344.49
NetU1.B_U10: U1.B.U10 U2.B.13 | length 770.1
  Top Layer w7: U1.B.U10@4440.94,5039.37 4440.94,5187.01 v2(4480.31,5226.38) ; v2(4504.09,5712.44) U2.B.13@4504.09,5778.5
  Mid-Layer 1 w7: v2(4480.31,5226.38) 4509.84,5255.91 4509.84,5706.69 v2(4504.09,5712.44)
NetU1.B_U11: U1.B.U11 U2.B.10 | length 820.5
  Top Layer w7: U1.B.U11@4401.57,5039.37 4401.57,5236.22 v2(4431.1,5265.75) ; v2(4598.43,5724.41) U2.B.10@4598.43,5778.35
  Mid-Layer 2 w7: v2(4431.1,5265.75) 4500,5334.65 4500,5413.39 4598.43,5511.81 v2(4598.43,5724.41)
NetU1.B_U12: U1.B.U12 U2.B.8 | length 1056.6
  Top Layer w7: v1(4362.2,4950.79) 4342.52,4970.47 4342.52,5019.69 U1.B.U12@4362.2,5039.37 ; v2(4568.9,5620.08) 4661.57,5712.76 U2.B.8@4661.57,5778.5
  Mid-Layer 1 w7: v1(4362.2,4950.79) 4362.2,4980.31 4568.9,5187.01 v2(4568.9,5620.08)
NetU1.B_U13: U1.B.U13 U2.B.5 | length 940.6
  Top Layer w7: U1.B.U13@4322.83,5039.37 4342.52,5059.06 v1(4342.52,5068.9) ; v2(4677.17,5423.23) 4755.91,5501.97 U2.B.5@4755.91,5777.56
  Bottom Layer w7: v1(4342.52,5068.9) 4381.89,5108.27 4421.26,5108.27 4677.17,5364.17 v2(4677.17,5423.23)
NetU1.B_U14: U1.B.U14 U2.B.2 | length 1043.2
  Top Layer w7: U1.B.U14@4283.46,5039.37 4283.46,5078.74 v2(4342.52,5137.8) ; v2(4850.55,5704.88) U2.B.2@4850.55,5778.5
  Bottom Layer w7: v2(4342.52,5137.8) 4391.73,5187.01 4391.73,5364.17 4627.95,5600.39 4746.06,5600.39 v2(4850.55,5704.88)
NetU1.C_J16: U1.C.J16 U2.C.23 | length 1253.7
  Top Layer w7: v2(5401.73,5641.89) U2.C.23@5401.73,5778.5 ; U1.C.J16@5417.32,4724.41 5421.26,4724.41 v1(5444.88,4748.03)
  Bottom Layer w7: v2(5401.73,5641.89) 5232.28,5472.44 5232.28,4913.39 5397.64,4748.03 v1(5444.88,4748.03)
NetU1.C_J17: U1.C.J17 U2.C.24 | length 1184.6
  Top Layer w7: U2.C.24@5370.24,5778.5 5370.24,5685.2 5216.54,5531.5 5216.54,4885.83 U1.C.J17@5377.95,4724.41
NetU1.C_K16: U1.C.K16 U2.C.25 | length 1172.9
  Top Layer w7: v2(5338.58,5716.54) U2.C.25@5338.58,5779.53 ; U1.C.K16@5417.32,4763.78 5440.94,4787.4 v1(5444.88,4787.4)
  Mid-Layer 1 w7: v2(5338.58,5527.56) v2(5338.58,5716.54)
  Bottom Layer w7: v2(5338.58,5527.56) 5251.97,5440.94 5251.97,5358.27 5259.84,5350.39 5259.84,4925.2 5397.64,4787.4 v1(5444.88,4787.4)
NetU1.C_K17: U1.C.K17 U2.C.26 | length 1101.2
  Top Layer w7: v2(5244.09,5519.69) 5244.09,4897.64 U1.C.K17@5377.95,4763.78 ; v2(5307.09,5696.85) U2.C.26@5307.09,5783.46
  Mid-Layer 1 w7: v2(5244.09,5519.69) 5244.09,5633.86 v2(5307.09,5696.85)
NetU1.C_L16: U1.C.L16 U2.C.29 | length 653
  Top Layer w7: v2(5287.4,5283.46) 5307.09,5303.15 U2.C.29@5307.09,5341.34 ; U1.C.L16@5417.32,4803.15 v1(5444.88,4830.71)
  Bottom Layer w7: v2(5287.4,5283.46) 5287.4,4937.01 5393.7,4830.71 v1(5444.88,4830.71)
NetU1.C_L17: U1.C.L17 U2.C.30 | length 615.1
  Top Layer w7: U2.C.30@5338.58,5346.46 5338.58,5299.21 5271.65,5232.28 5271.65,4909.45 U1.C.L17@5377.95,4803.15
NetU1.C_M16: U1.C.M16 U2.C.31 | length 614.6
  Top Layer w7: v2(5314.96,5244.09) 5370.08,5299.21 U2.C.31@5370.08,5341.34 ; U1.C.M16@5417.32,4842.52 v1(5444.88,4870.08)
  Bottom Layer w7: v2(5314.96,5244.09) 5314.96,4952.76 5397.64,4870.08 v1(5444.88,4870.08)
NetU1.C_M17: U1.C.M17 U2.C.32 | length 570.8
  Top Layer w7: U1.C.M17@5377.95,4842.52 5303.15,4917.32 5303.15,5196.85 5401.73,5295.43 U2.C.32@5401.73,5341.5
NetU1.C_N16: U1.C.N16 U2.C.34 | length 579.6
  Top Layer w7: v2(5354.33,5145.67) 5464.72,5256.06 U2.C.34@5464.72,5341.5 ; U1.C.N16@5417.32,4881.89 5437.01,4901.57 v1(5444.88,4901.57)
  Bottom Layer w7: v2(5354.33,5145.67) 5354.33,4956.69 5409.45,4901.57 v1(5444.88,4901.57)
NetU1.C_N17: U1.C.N17 U2.C.33 | length 528.2
  Top Layer w7: U1.C.N17@5377.95,4881.89 5330.71,4929.13 5330.71,5161.42 5437.01,5267.72 U2.C.33@5437.01,5346.46
NetU1.C_P16: U1.C.P16 U2.C.35 | length 618.9
  Top Layer w7: U1.C.P16@5417.32,4921.26 5433.07,4921.26 v1(5444.88,4933.07) ; v2(5464.57,5401.57) 5496.22,5369.92 U2.C.35@5496.22,5341.5
  Mid-Layer 1 w7: v1@5444.88,4937.01 v1(5444.88,4933.07) 5417.32,4960.63 5417.32,5133.86 5476.38,5192.91 5476.38,5389.76 v2(5464.57,5401.57)
NetU1.C_R17: U1.C.R17 U2.C.36 | length 464.4
  Top Layer w7: U1.C.R17@5377.95,4960.63 5350.39,4988.19 5350.39,5106.3 5531.5,5287.4 U2.C.36@5531.5,5338.58
NetU1.C_T4: U1.C.T4 U1.D.U3 | length 2612.7
  Top Layer w7: U1.C.T4@5889.76,5000 5909.45,5019.68 5909.45,5053.15 v3(5972.44,5116.14) ; U1.D.U3@7141.73,5039.37 7141.73,5059.05 v3(7248.03,5165.35)
  Bottom Layer w8: v3(5972.44,5116.14) 6000,5143.7 ; 5998.03,5143.7 6070.87,5143.7 6119.69,5192.53 6119.69,5212.21 6179.13,5271.65 6196.85,5271.65 6263.78,5338.58 6263.78,5389.76 6625.98,5751.97 7291.34,5751.97 7366.14,5677.17 7366.14,5283.46 v3(7248.03,5165.35)
NetU1.C_T6: U1.C.T6 U2.C.53 | length 458.8
  Top Layer w7: U1.C.T6@5811.02,5000 5830.71,5019.69 5830.71,5080.71 6063.15,5313.15 U2.C.53@6063.15,5341.5 ; U2.C.53@6066.93,5341.5 U2.C.53@6066.93,5354.33
NetU1.C_T7: U1.C.T7 U2.C.50 | length 423.1
  Top Layer w7: U1.C.T7@5771.65,5000 5791.34,5019.69 5791.34,5108.27 5968.66,5285.59 U2.C.50@5968.66,5341.5
NetU1.C_T8: U1.C.T8 U2.C.45 | length 390.5
  Top Layer w7: U1.C.T8@5732.28,5000 5712.6,5019.69 5712.6,5127.95 5811.18,5226.54 U2.C.45@5811.18,5341.5
NetU1.C_T9: U1.C.T9 U2.C.42 | length 367.7
  Top Layer w7: U1.C.T9@5692.91,5000 5673.23,5019.68 5673.23,5167.32 5716.69,5210.79 U2.C.42@5716.69,5341.5
NetU1.C_T10: U1.C.T10 U2.C.11 | length 897.2
  Top Layer w7: U1.C.T10@5653.54,5000 v1(5681.1,4972.44) ; v2(5779.53,5712.6) U2.C.11@5779.53,5763.78
  Mid-Layer 1 w7: v1(5681.1,4972.44) 5681.1,4988.19 5811.02,5118.11 5811.02,5681.1 v2(5779.53,5712.6)
NetU1.C_T11: U1.C.T11 U2.C.7 | length 915.1
  Top Layer w7: U1.C.T11@5614.17,5000 5633.86,5019.69 5633.86,5216.54 v2(5683.07,5265.75) ; U2.C.7@5905.67,5791.18 5905.67,5712.44 v2(5909.45,5708.66)
  Mid-Layer 2 w7: v2(5683.07,5265.75) 5909.45,5492.13 v2(5909.45,5708.66)
NetU1.C_T12: U1.C.T12 U2.C.4 | length 1036.4
  Top Layer w7: U1.C.T12@5574.8,5000 v1(5604.33,4970.47) ; v2(5998.03,5718.5) 6000,5720.47 U2.C.4@6000,5791.34
  Mid-Layer 1 w7: v1(5604.33,4970.47) v1@5614.17,4970.47
  Mid-Layer 2 w7: v1(5604.33,4970.47) 5988.19,5354.33 5988.19,5698.82 5998.03,5708.66 v2(5998.03,5718.5)
NetU1.C_U4: U1.C.U4 U4.5 | length 6108
  Top Layer w7: v3(2494.09,4887.8) 2503.94,4877.95 U4.5@2553.15,4877.95 ; U1.C.U4@5889.76,5039.37 5889.76,5062.99 6017.72,5190.94 6100.39,5190.94 6179.91,5270.46 6223.22,5270.46 6261.81,5309.06 6261.81,5799.21 v3(6232.28,5828.74) ; 6007.87,5181.1 6027.56,5181.1
  Mid-Layer 1 w8: v3(2494.09,4887.8) 2421.26,4960.63 2421.26,5842.52 2509.84,5931.1 2663.39,5931.1 2732.28,5862.2 v3(2901.57,5862.2)
  Bottom Layer w8: v3(2901.57,5862.2) 3651.57,5862.2 3712.6,5801.18 4324.8,5801.18 4385.83,5862.2 4870.08,5862.2 4954.72,5777.56 5399.61,5777.56 5484.25,5862.2 6051.18,5862.2 6084.65,5828.74 v3(6232.28,5828.74)
NetU1.C_U6: U1.C.U6 U2.C.51 | length 380.5
  Top Layer w7: U1.C.U6@5811.02,5039.37 5811.02,5088.58 6000.16,5277.72 U2.C.51@6000.16,5341.5
NetU1.C_U7: U1.C.U7 U2.C.48 | length 362.2
  Top Layer w7: U1.C.U7@5771.65,5039.37 5771.65,5118.11 5909.45,5255.91 U2.C.48@5909.45,5344.49
NetU1.C_U8: U1.C.U8 U2.C.47 | length 360.9
  Top Layer w7: U1.C.U8@5732.28,5039.37 5732.28,5118.11 5874.17,5260 U2.C.47@5874.17,5341.5
NetU1.C_U9: U1.C.U9 U2.C.44 | length 341.8
  Top Layer w7: U1.C.U9@5692.91,5039.37 5692.91,5147.64 5781.5,5236.22 U2.C.44@5781.5,5344.49
NetU1.C_U10: U1.C.U10 U2.C.13 | length 770.1
  Top Layer w7: U1.C.U10@5653.54,5039.37 5653.54,5187.01 v2(5692.91,5226.38) ; v2(5716.69,5712.44) U2.C.13@5716.69,5778.5
  Mid-Layer 1 w7: v2(5692.91,5226.38) 5722.44,5255.91 5722.44,5706.69 v2(5716.69,5712.44)
NetU1.C_U11: U1.C.U11 U2.C.10 | length 820.5
  Top Layer w7: U1.C.U11@5614.17,5039.37 5614.17,5236.22 v2(5643.7,5265.75) ; v2(5811.02,5724.41) U2.C.10@5811.02,5778.35
  Mid-Layer 2 w7: v2(5643.7,5265.75) 5712.6,5334.65 5712.6,5413.39 5811.02,5511.81 v2(5811.02,5724.41)
NetU1.C_U12: U1.C.U12 U2.C.8 | length 1056.6
  Top Layer w7: v1(5574.8,4950.79) 5555.12,4970.47 5555.12,5019.69 U1.C.U12@5574.8,5039.37 ; v2(5781.5,5620.08) 5874.17,5712.76 U2.C.8@5874.17,5778.5
  Mid-Layer 1 w7: v1(5574.8,4950.79) 5574.8,4980.31 5781.5,5187.01 v2(5781.5,5620.08)
NetU1.C_U13: U1.C.U13 U2.C.5 | length 940.6
  Top Layer w7: U1.C.U13@5535.43,5039.37 5555.12,5059.06 v1(5555.12,5068.9) ; v2(5889.76,5423.23) 5968.5,5501.97 U2.C.5@5968.5,5777.56
  Bottom Layer w7: v1(5555.12,5068.9) 5594.49,5108.27 5633.86,5108.27 5889.76,5364.17 v2(5889.76,5423.23)
NetU1.C_U14: U1.C.U14 U2.C.2 | length 1073.2
  Top Layer w7: U1.C.U14@5496.06,5039.37 5496.06,5078.74 v2(5555.12,5137.8) ; v3(6009.84,5600.39) 6063.15,5653.7 U2.C.2@6063.15,5778.5
  Bottom Layer w7: v2(5555.12,5137.8) 5604.33,5187.01 5604.33,5364.17 5840.55,5600.39 5935.04,5600.39
  Bottom Layer w8: 5935.04,5600.39 v3(6009.84,5600.39)
NetU1.D_J16: U1.D.J16 U2.D.23 | length 1253.7
  Top Layer w7: v2(6614.33,5641.89) U2.D.23@6614.33,5778.5 ; U1.D.J16@6629.92,4724.41 6633.86,4724.41 v1(6657.48,4748.03)
  Bottom Layer w7: v2(6614.33,5641.89) 6444.88,5472.44 6444.88,4913.39 6610.24,4748.03 v1(6657.48,4748.03)
NetU1.D_J17: U1.D.J17 U2.D.24 | length 1184.6
  Top Layer w7: U2.D.24@6582.83,5778.5 6582.83,5685.2 6429.13,5531.5 6429.13,4885.83 U1.D.J17@6590.55,4724.41
NetU1.D_K16: U1.D.K16 U2.D.25 | length 1172.9
  Top Layer w7: v2(6551.18,5716.54) U2.D.25@6551.18,5779.53 ; U1.D.K16@6629.92,4763.78 6653.54,4787.4 v1(6657.48,4787.4)
  Mid-Layer 1 w7: v2(6551.18,5527.56) v2(6551.18,5716.54)
  Bottom Layer w7: v2(6551.18,5527.56) 6464.57,5440.94 6464.57,5358.27 6472.44,5350.39 6472.44,4925.2 6610.24,4787.4 v1(6657.48,4787.4)
NetU1.D_K17: U1.D.K17 U2.D.26 | length 1101.2
  Top Layer w7: v2(6456.69,5519.69) 6456.69,4897.64 U1.D.K17@6590.55,4763.78 ; v2(6519.69,5696.85) U2.D.26@6519.69,5783.46
  Mid-Layer 1 w7: v2(6456.69,5519.69) 6456.69,5633.86 v2(6519.69,5696.85)
NetU1.D_L16: U1.D.L16 U2.D.29 | length 653
  Top Layer w7: v2(6500,5283.46) 6519.69,5303.15 U2.D.29@6519.69,5341.34 ; U1.D.L16@6629.92,4803.15 v1(6657.48,4830.71)
  Bottom Layer w7: v2(6500,5283.46) 6500,4937.01 6606.3,4830.71 v1(6657.48,4830.71)
NetU1.D_L17: U1.D.L17 U2.D.30 | length 615.1
  Top Layer w7: U2.D.30@6551.18,5346.46 6551.18,5299.21 6484.25,5232.28 6484.25,4909.45 U1.D.L17@6590.55,4803.15
NetU1.D_M16: U1.D.M16 U2.D.31 | length 614.6
  Top Layer w7: v2(6527.56,5244.09) 6582.68,5299.21 U2.D.31@6582.68,5341.34 ; U1.D.M16@6629.92,4842.52 v1(6657.48,4870.08)
  Bottom Layer w7: v2(6527.56,5244.09) 6527.56,4952.76 6610.24,4870.08 v1(6657.48,4870.08)
NetU1.D_M17: U1.D.M17 U2.D.32 | length 570.8
  Top Layer w7: U1.D.M17@6590.55,4842.52 6515.75,4917.32 6515.75,5196.85 6614.33,5295.43 U2.D.32@6614.33,5341.5
NetU1.D_N16: U1.D.N16 U2.D.34 | length 579.6
  Top Layer w7: v2(6566.93,5145.67) 6677.32,5256.06 U2.D.34@6677.32,5341.5 ; U1.D.N16@6629.92,4881.89 6649.61,4901.57 v1(6657.48,4901.57)
  Bottom Layer w7: v2(6566.93,5145.67) 6566.93,4956.69 6622.05,4901.57 v1(6657.48,4901.57)
NetU1.D_N17: U1.D.N17 U2.D.33 | length 528.2
  Top Layer w7: U1.D.N17@6590.55,4881.89 6543.31,4929.13 6543.31,5161.42 6649.61,5267.72 U2.D.33@6649.61,5346.46
NetU1.D_P16: U1.D.P16 U2.D.35 | length 618.9
  Top Layer w7: U1.D.P16@6629.92,4921.26 6645.67,4921.26 v1(6657.48,4933.07) ; v2(6677.17,5401.57) 6708.82,5369.92 U2.D.35@6708.82,5341.5
  Mid-Layer 1 w7: v1@6657.48,4937.01 v1(6657.48,4933.07) 6629.92,4960.63 6629.92,5133.86 6688.98,5192.91 6688.98,5389.76 v2(6677.17,5401.57)
NetU1.D_R17: U1.D.R17 U2.D.36 | length 464.4
  Top Layer w7: U1.D.R17@6590.55,4960.63 6562.99,4988.19 6562.99,5106.3 6744.09,5287.4 U2.D.36@6744.09,5338.58
NetU1.D_T6: U1.D.T6 U2.D.53 | length 460.3
  Top Layer w7: U1.D.T6@7023.62,5000 7043.31,5019.69 7043.31,5068.9 7119.41,5145 7279.53,5305.12 U2.D.53@7279.53,5354.33
NetU1.D_T7: U1.D.T7 U2.D.50 | length 423.1
  Top Layer w7: U1.D.T7@6984.25,5000 7003.94,5019.69 7003.94,5108.27 7181.26,5285.59 U2.D.50@7181.26,5341.5
NetU1.D_T8: U1.D.T8 U2.D.45 | length 390.5
  Top Layer w7: U1.D.T8@6944.88,5000 6925.2,5019.69 6925.2,5127.95 7023.78,5226.54 U2.D.45@7023.78,5341.5
NetU1.D_T9: U1.D.T9 U2.D.42 | length 367.7
  Top Layer w7: U1.D.T9@6905.51,5000 6885.83,5019.68 6885.83,5167.32 6929.29,5210.79 U2.D.42@6929.29,5341.5
NetU1.D_T10: U1.D.T10 U2.D.11 | length 897.2
  Top Layer w7: U1.D.T10@6866.14,5000 v1(6893.7,4972.44) ; v2(6992.13,5712.6) U2.D.11@6992.13,5763.78
  Mid-Layer 1 w7: v1(6893.7,4972.44) 6893.7,4988.19 7023.62,5118.11 7023.62,5681.1 v2(6992.13,5712.6)
NetU1.D_T11: U1.D.T11 U2.D.7 | length 915.1
  Top Layer w7: U1.D.T11@6826.77,5000 6846.46,5019.69 6846.46,5216.54 v2(6895.67,5265.75) ; U2.D.7@7118.27,5791.18 7118.27,5712.44 v2(7122.05,5708.66)
  Mid-Layer 2 w7: v2(6895.67,5265.75) 7122.05,5492.13 v2(7122.05,5708.66)
NetU1.D_T12: U1.D.T12 U2.D.4 | length 1036.4
  Top Layer w7: U1.D.T12@6787.4,5000 v1(6816.93,4970.47) ; v2(7210.63,5718.5) 7212.6,5720.47 U2.D.4@7212.6,5791.34
  Mid-Layer 1 w7: v1(6816.93,4970.47) v1@6826.77,4970.47
  Mid-Layer 2 w7: v1(6816.93,4970.47) 7200.79,5354.33 7200.79,5698.82 7210.63,5708.66 v2(7210.63,5718.5)
NetU1.D_U4: U1.D.U4 U4.3 | length 6516.5
  Top Layer w7: v3(2486.22,4978.35) 2486.22,4950.79 2519.68,4917.32 U4.3@2553.15,4917.32 ; 2525.59,4915.35 U4.3@2547.24,4915.35 ; U1.D.U4@7102.36,5039.37 v5(7122.05,5059.06)
  Mid-Layer 1 w8: v3(2576.77,5049.21) 2614.17,5086.61 2614.17,5129.92 2704.72,5220.47 2704.72,5667.32 2811.02,5773.62 3590.55,5773.62 3631.89,5732.28 3781.5,5732.28 3848.43,5799.21 4940.94,5799.21 5009.84,5730.31 5135.83,5730.31 5192.91,5787.4 6049.21,5787.4 6116.14,5720.47 6368.11,5720.47 v3(6421.26,5773.62)
  Mid-Layer 2 w8: v3(2486.22,4978.35) 2557.09,5049.21 v3(2576.77,5049.21) ; v3(6421.26,5773.62) 7261.81,5773.62 7318.9,5716.54 7318.9,5379.92 7122.05,5183.07 v5(7122.05,5059.06)
NetU1.D_U6: U1.D.U6 U2.D.51 | length 380.5
  Top Layer w7: U1.D.U6@7023.62,5039.37 7023.62,5088.58 7212.76,5277.72 U2.D.51@7212.76,5341.5
NetU1.D_U7: U1.D.U7 U2.D.48 | length 362.2
  Top Layer w7: U1.D.U7@6984.25,5039.37 6984.25,5118.11 7122.05,5255.91 U2.D.48@7122.05,5344.49
NetU1.D_U8: U1.D.U8 U2.D.47 | length 360.9
  Top Layer w7: U1.D.U8@6944.88,5039.37 6944.88,5118.11 7086.77,5260 U2.D.47@7086.77,5341.5
NetU1.D_U9: U1.D.U9 U2.D.44 | length 341.8
  Top Layer w7: U1.D.U9@6905.51,5039.37 6905.51,5147.64 6994.09,5236.22 U2.D.44@6994.09,5344.49
NetU1.D_U10: U1.D.U10 U2.D.13 | length 770.1
  Top Layer w7: U1.D.U10@6866.14,5039.37 6866.14,5187.01 v2(6905.51,5226.38) ; v2(6929.29,5712.44) U2.D.13@6929.29,5778.5
  Mid-Layer 1 w7: v2(6905.51,5226.38) 6935.04,5255.91 6935.04,5706.69 v2(6929.29,5712.44)
NetU1.D_U11: U1.D.U11 U2.D.10 | length 820.5
  Top Layer w7: U1.D.U11@6826.77,5039.37 6826.77,5236.22 v2(6856.3,5265.75) ; v2(7023.62,5724.41) U2.D.10@7023.62,5778.35
  Mid-Layer 2 w7: v2(6856.3,5265.75) 6925.2,5334.65 6925.2,5413.39 7023.62,5511.81 v2(7023.62,5724.41)
NetU1.D_U12: U1.D.U12 U2.D.8 | length 1056.6
  Top Layer w7: v1(6787.4,4950.79) 6767.72,4970.47 6767.72,5019.69 U1.D.U12@6787.4,5039.37 ; v2(6994.09,5620.08) 7086.77,5712.76 U2.D.8@7086.77,5778.5
  Mid-Layer 1 w7: v1(6787.4,4950.79) 6787.4,4980.31 6994.09,5187.01 v2(6994.09,5620.08)
NetU1.D_U13: U1.D.U13 U2.D.5 | length 940.6
  Top Layer w7: U1.D.U13@6748.03,5039.37 6767.72,5059.06 v1(6767.72,5068.9) ; v2(7102.36,5423.23) 7181.1,5501.97 U2.D.5@7181.1,5777.56
  Bottom Layer w7: v1(6767.72,5068.9) 6807.09,5108.27 6846.46,5108.27 7102.36,5364.17 v2(7102.36,5423.23)
NetU1.D_U14: U1.D.U14 U2.D.2 | length 1043.2
  Top Layer w7: U1.D.U14@6708.66,5039.37 6708.66,5078.74 v2(6767.72,5137.8) ; v2(7275.75,5704.88) U2.D.2@7275.75,5778.5
  Bottom Layer w7: v2(6767.72,5137.8) 6816.93,5187.01 6816.93,5364.17 7053.15,5600.39 7171.26,5600.39 v2(7275.75,5704.88)
NetU3_M6: U3.M6 U5.3 | length 961.2
  Top Layer w7: U5.3@2681.1,3825.79 v3(2804.13,3825.79) ; v4(3513.78,3622.05) U3.M6@3533.46,3641.73
  Mid-Layer 1 w6: 3218.5,3602.36 3494.09,3602.36 v4(3513.78,3622.05)
  Mid-Layer 1 w7: v3(2804.13,3825.79) 2852.36,3777.56 3043.31,3777.56 3218.5,3602.36
NetU3_M11: U3.M11 U9.40 | length 1508.1
  Top Layer w7: v4(3710.63,3622.05) U3.M11@3730.32,3641.73 ; v3(3730.32,3374.02) 4013.78,3374.02 4102.36,3285.43 4102.36,3259.84 4133.86,3228.35 4287.4,3228.35 v3(4375.98,3316.93)
  Top Layer w9: v3(4620.08,3468.5) 4620.08,3509.84 4653.54,3543.31 U9.40@4653.54,3572.83
  Mid-Layer 1 w6: v4(3710.63,3622.05) 3730.32,3602.36 3730.32,3470.47 3719.62,3459.77
  Mid-Layer 1 w7: 3719.62,3459.77 3702.76,3442.91 3702.76,3397.64 3726.38,3374.02 v3(3730.32,3374.02)
  Mid-Layer 2 w7: v3(4375.98,3316.93) 4496.06,3316.93 4620.08,3440.94 v3(4620.08,3468.5)
NetU3_N9: U3.N9 U9.39 | length 1638.5
  Top Layer w7: U3.N9@3651.58,3602.36 v4(3671.26,3582.68) ; v3(3690.94,3350.39) 4007.87,3350.39 4076.77,3281.5 4076.77,3251.97 4131.89,3196.85 4297.24,3196.85 v3(4377.95,3277.56)
  Top Layer w9: v3(4653.54,3511.81) 4681.1,3511.81 4685.04,3515.75 U9.39@4685.04,3580.71
  Mid-Layer 1 w6: v4(3671.26,3582.68) 3690.94,3562.99 3690.94,3523.62 3685.94,3518.62
  Mid-Layer 1 w7: 3685.94,3518.62 3629.92,3462.6 3629.92,3419.29 3687.01,3362.2 v3@3687.01,3348.43
  Mid-Layer 2 w7: v3(4377.95,3277.56) 4500,3277.56 4651.57,3429.13 4651.57,3433.07 4653.54,3435.04 v3(4653.54,3511.81)
NetU3_P6: U3.P6 U5.10 | length 935.9
  Top Layer w7: U5.10@2681.1,3646.65 2760.83,3646.65 v3(2883.86,3523.62) ; v4(3513.78,3543.31) U3.P6@3533.46,3562.99
  Mid-Layer 1 w6: 3248.03,3523.62 3375.98,3523.62 v4(3395.67,3503.94)
  Mid-Layer 1 w7: v3(2883.86,3523.62) 3248.03,3523.62
  Mid-Layer 2 w7: v4(3395.67,3503.94) 3474.41,3503.94 v4(3513.78,3543.31)
NetU3_P12: U3.P12 U10.2 | length 4353.4
  Top Layer w7: v4@3748.03,3582.68 3767.72,3562.99 U3.P12@3769.69,3562.99 ; v3(7150.98,3942.32) U10.2@7217.52,3942.32
  Mid-Layer 1 w6: v4(3750,3582.68) 3769.68,3562.99 3769.68,3295.28
  Mid-Layer 1 w7: v4@3748.03,3582.68 v4@3749.02,3581.69 ; 3769.68,3295.28 3929.13,3135.83 4035.43,3135.83 4057.09,3157.48 4200.79,3157.48 4222.44,3135.83 4907.48,3135.83 5059.06,3287.4 6088.58,3287.4 6114.17,3261.81 6425.2,3261.81 6450.79,3287.4 6734.25,3287.4 7104.33,3657.48 7104.33,3895.67 v3(7150.98,3942.32)
NetU3_P13: U3.P13 U10.7 | length 4855
  Top Layer w7: v4(3750,3543.31) 3789.37,3543.31 U3.P13@3809.06,3562.99 ; U10.7@7425.2,3942.91 v3(7496.06,3942.91)
  Mid-Layer 1 w7: v4(3750,3543.31) 3750,3277.56 3923.23,3104.33 7145.67,3104.33 7452.76,3411.42 7452.76,3899.61 v3(7496.06,3942.91)
PPI0: U1.A.B9 U1.B.B9 U1.C.B9 U1.D.B9 U3.B4 | length 4816.8
  Top Layer w7: U1.A.B9@3267.72,4448.82 3287.4,4429.13 3287.4,4236.22 v2(3291.34,4232.28) 3307.09,4232.28 3435.04,4104.33 3435.04,4055.12 U3.B4@3454.72,4035.43 ; U1.B.B9@4480.31,4448.82 4500,4429.13 4500,4236.22 v2(4503.94,4232.28) ; U1.C.B9@5692.91,4448.82 5712.6,4429.13 5712.6,4236.22 v2(5716.54,4232.28) ; U1.D.B9@6905.51,4448.82 6925.2,4429.13 6925.2,4236.22 v2(6929.13,4232.28)
  Mid-Layer 1 w7: v2(3291.34,4232.28) v2(6929.13,4232.28)